# EAGLE board layout (EAGLE 9.1.3)
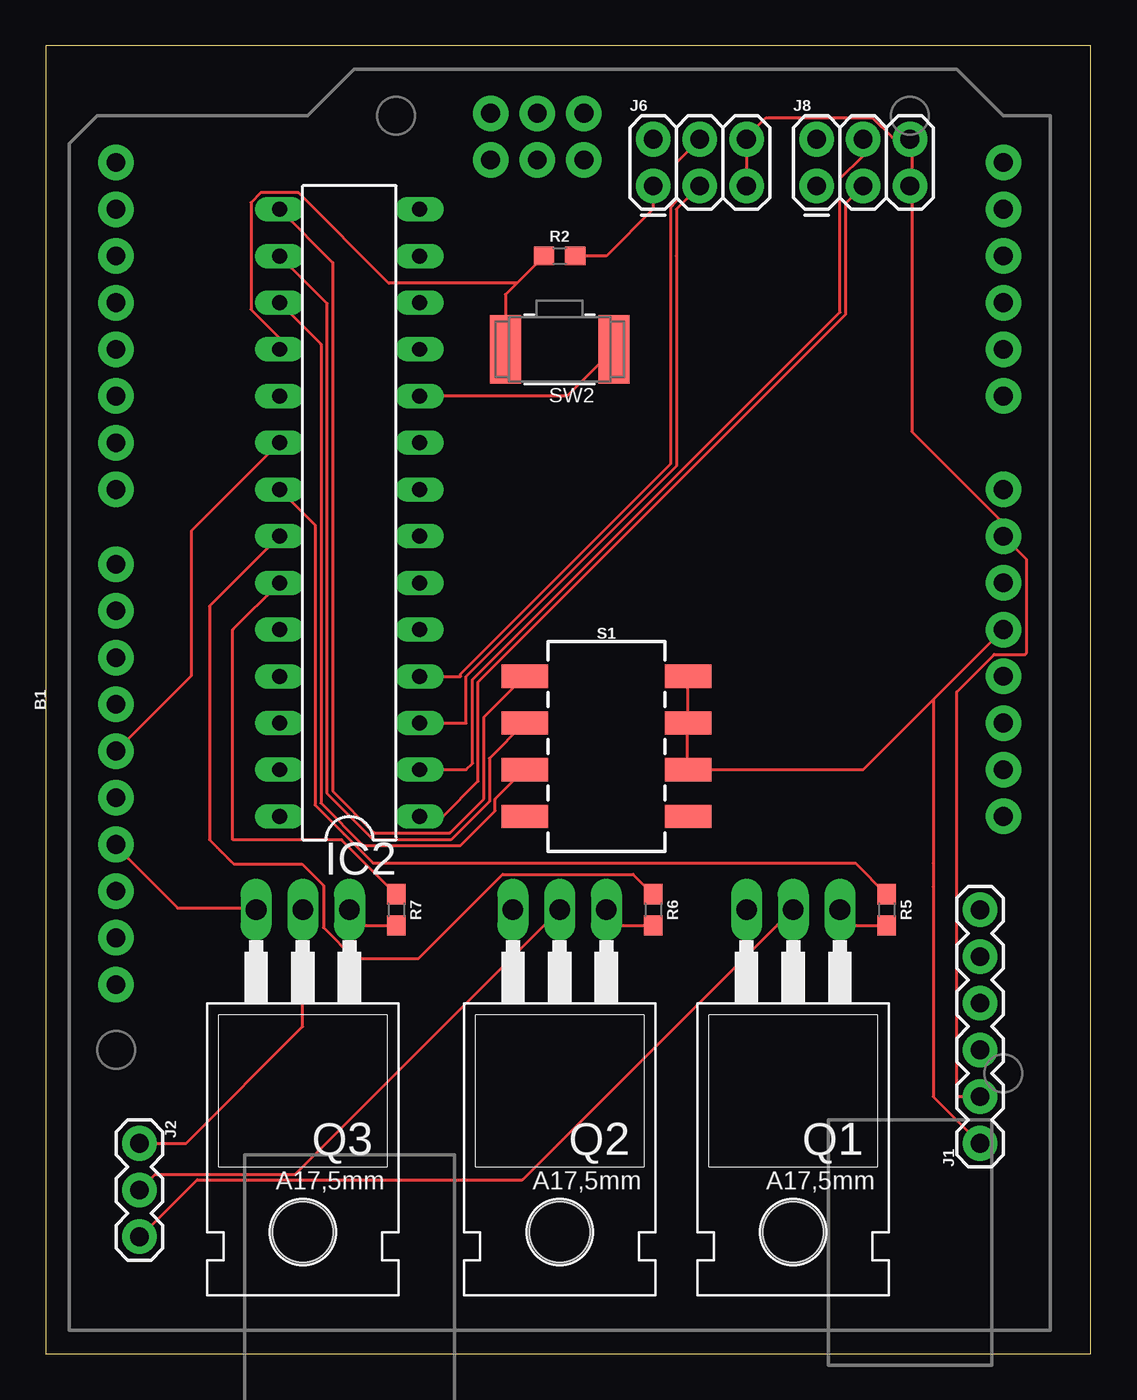
[diagram p0: board, top side]
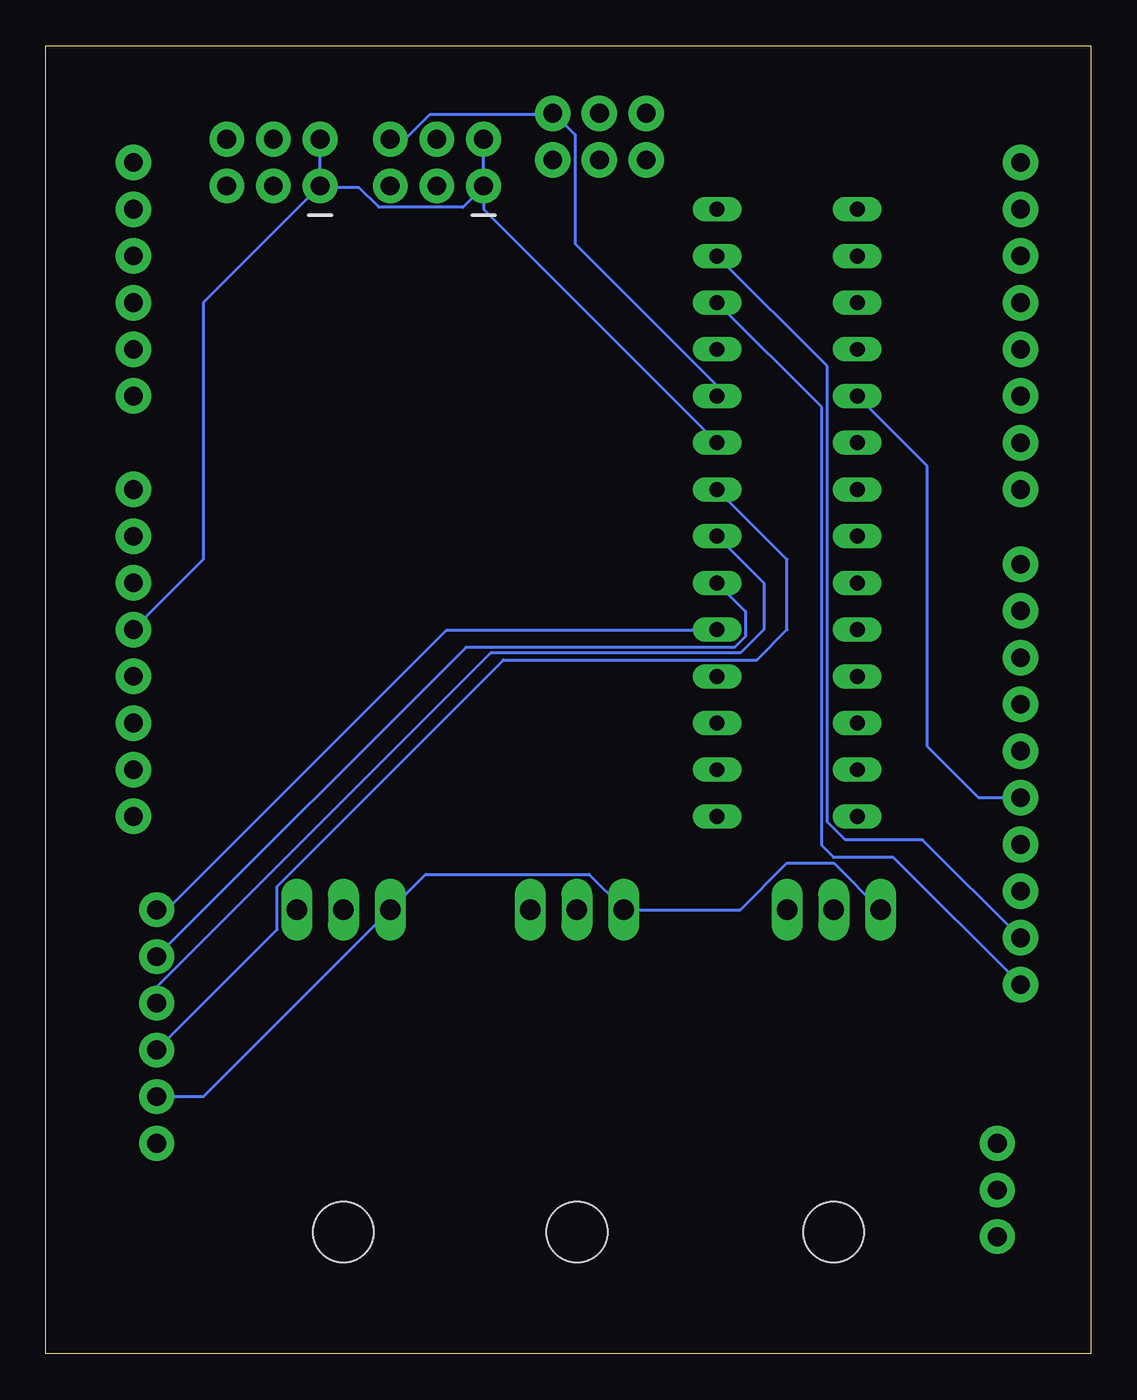
[diagram p1: board, bottom side, seen from below]

Size 56.82 x 71.11 mm. Coordinates in mm from the lower left corner, seen from the top.
Outline: 0,0 56.82,0 56.82,71.11 0,71.11 0,0
Copper layers (1*16): Top 0.035mm / dielectric 1.5mm / Bottom 0.035mm
Design rules "default": minimum track width 6mil, minimum drill 0.35mm, track to track 6mil, track to pad 6mil, pad to pad 6mil, via to via 6mil, smd to smd 6mil, copper to edge 40mil, drill to drill 6mil, minimum pad ring 10mil, minimum via ring 8mil, stop-mask expansion 4mil, vias tented up to drill 0mil, thermal gap 10mil

## Footprints (pad centres in the part's own frame; a part is rotated, then mirrored left to right if it is on the bottom)
ARDUINO_R3_NO_HOLES = drill 1.016 pad 1.93: 3.3V 1.27,-24.13; 5V 3.81,-24.13; A0 16.51,-24.13; A1 19.05,-24.13; A2 21.59,-24.13; A3 24.13,-24.13; A4 26.67,-24.13; A5 29.21,-24.13; AREF -10.414,24.13; D0 29.21,24.13; D1 26.67,24.13; D2 24.13,24.13; D3 21.59,24.13; D4 19.05,24.13; D5 16.51,24.13; D6 13.97,24.13; D7 11.43,24.13; D8 7.366,24.13; D9 4.826,24.13; D10 2.286,24.13; D11 -0.254,24.13; D12 -2.794,24.13; D13 -5.334,24.13; GND@1 6.35,-24.13; GND@2 8.89,-24.13; GND@3 -7.874,24.13; GND@4 31.89,-1.32; IOREF -3.81,-24.13; MISO 29.35,3.76; MOSI 31.89,1.22; NC -6.35,-24.13; RESET@1 -1.27,-24.13; RESET@2 29.35,-1.32; SCK 29.35,1.22; SCL -15.494,24.13; SDA -12.954,24.13; VCC 31.89,3.76; VIN 11.43,-24.13
DIL28-3 = drill 0.813 long: 1 -16.51,-3.81; 2 -13.97,-3.81; 3 -11.43,-3.81; 4 -8.89,-3.81; 5 -6.35,-3.81; 6 -3.81,-3.81; 7 -1.27,-3.81; 8 1.27,-3.81; 9 3.81,-3.81; 10 6.35,-3.81; 11 8.89,-3.81; 12 11.43,-3.81; 13 13.97,-3.81; 14 16.51,-3.81; 15 16.51,3.81; 16 13.97,3.81; 17 11.43,3.81; 18 8.89,3.81; 19 6.35,3.81; 20 3.81,3.81; 21 1.27,3.81; 22 -1.27,3.81; 23 -3.81,3.81; 24 -6.35,3.81; 25 -8.89,3.81; 26 -11.43,3.81; 27 -13.97,3.81; 28 -16.51,3.81
1X06 = drill 1.016 pad 1.88: 1 0,0; 2 2.54,0; 3 5.08,0; 4 7.62,0; 5 10.16,0; 6 12.7,0
1X03 = drill 1.016 pad 1.88: 1 0,0; 2 2.54,0; 3 5.08,0
2X3 = drill 1.016 pad 1.88: 1 0,0; 2 0,2.54; 3 2.54,0; 4 2.54,2.54; 5 5.08,0; 6 5.08,2.54
TO220 = drill 1.118 long: 1 -2.54,-6.35; 2 0,-6.35; 3 2.54,-6.35 | hole 3.302: 0,11.176
0603 = smd 1.1 x 1: 1 -0.85,0; 2 0.85,0
DIPSWITCH-04-SMD = smd 1.27 x 2.54: 1 -3.81,4.445; 2 -1.27,4.445; 3 1.27,4.445; 4 3.81,4.445; 5 3.81,-4.445; 6 1.27,-4.445; 7 -1.27,-4.445; 8 -3.81,-4.445
BTN_CK_KSS = smd 1.7 x 3.7: P$1 -2.95,0; P$2 2.95,0

## Placement (x,y rotation side)
B1  ARDUINO_UNO_R3NO_HOLES  [ARDUINO_R3_NO_HOLES]  27.94,35.56 90 top
IC2  MCP23017SP  [DIL28-3]  16.51,45.72 90 top
J1  IR Sensor  [1X06]  50.8,11.43 90 top
J2  LED  [1X03]  5.08,11.43 270 top
J6  Theta  [2X3]  33.02,63.5 0 top
J8  Radius  [2X3]  41.91,63.5 0 top
Q1  200mA/40V  [TO220]  40.64,17.78 180 top
Q2  200mA/40V  [TO220]  27.94,17.78 180 top
Q3  200mA/40V  [TO220]  13.97,17.78 180 top
R2  10k  [0603]  27.94,59.69 0 top
R5  100  [0603]  45.72,24.13 270 top
R6  100  [0603]  33.02,24.13 270 top
R7  100  [0603]  19.05,24.13 270 top
S1  DIP-04SMD  [DIPSWITCH-04-SMD]  30.48,33.02 270 top
SW2  Reset  [BTN_CK_KSS]  27.94,54.61 180 top

## Library data of the parts
B1 = SparkFun-Boards
IC2 SW2 = adafruit
J1 = SparkFun-Connectors; PROD_ID: CONN-08437
J2 = SparkFun-Connectors
J6 J8 = SparkFun-Connectors; PROD_ID: CONN-09701
Q1-Q3 = transistor-neu-to92
R2 = SparkFun-Resistors; PROD_ID: RES-00824
R5-R7 = SparkFun-Resistors; PROD_ID: RES-12438
S1 = SparkFun-Switches; PROD_ID: SWCH-12418

## Nets
A0: IC2.15 S1.8
A1: IC2.16 S1.7
A2: IC2.17 S1.6
B: IC2.23 R7.1
G: IC2.22 R6.1
GND: B1.GND@2 B1.GND@3 B1.GND@4 IC2.10 J1.2 J6.5 J6.6 J8.5 J8.6 Q1.3 Q2.3 Q3.3 SW2.P$1
INT_A: B1.D12 IC2.20
INT_B: B1.D13 IC2.19
IR_A: IC2.8 J1.3
IR_B: IC2.7 J1.4
IR_C: IC2.6 J1.5
IR_D: IC2.5 J1.6
N$14: Q1.1 R5.2
N$15: Q2.1 R6.2
N$16: Q3.1 R7.2
N$17: J2.3 Q1.2
N$18: J2.2 Q2.2
N$19: J2.1 Q3.2
R: IC2.21 R5.1
RADIUS_A: IC2.1 J8.3
RADIUS_B: IC2.2 J8.4
RESET: IC2.18 R2.1 SW2.P$2
SDA: B1.SDA IC2.13
SDL: B1.SCL IC2.12
THETA_A: IC2.3 J6.3
THETA_B: IC2.4 J6.4
VCC: B1.5V IC2.9 J1.1 J6.1 J6.2 J8.1 J8.2 R2.2 S1.1 S1.2 S1.3

## Tracks (layer width: path | path; a pad name or v marks a point on that pad's centre or on a via)
A0
  Top 0.152: S1.8 23.81,34.61 23.81,30.16 21.97,28.32 17.86,28.32 15.6,30.58 15.6,59.33 IC2.15
A1
  Top 0.152: IC2.16 15.29,57.1 15.29,30.45 17.8,27.94 22.02,27.94 24.12,30.04 24.12,32.37 S1.7
A2
  Top 0.152: IC2.17 14.96,54.89 14.96,29.93 17.26,27.64 22.55,27.64 24.43,29.52 24.43,30.15 S1.6
B
  Top 0.152: R7.1 16.09,27.94 10.16,27.94 10.16,39.37 IC2.23
G
  Top 0.152: R6.1 31.94,26.06 24.84,26.06 20.27,21.49 16.76,21.49 15.09,23.16 15.09,25.45 13.92,26.62 10.21,26.62 8.89,27.94 8.89,40.64 IC2.22
GND
  Top 0.152: J6.5 38.1,63.55 38.1,65.99 J6.6 38.1,66.14 39.17,67.21 44.96,67.21 46.02,66.14 46.94,66.14 J8.6 47.09,65.99 47.09,63.55 J8.5 47.09,63.4 47.09,50.14 51.97,45.26 51.97,44.5 B1.GND@2 53.34,43.18 53.34,38.1 53.26,38.02 51.58,38.02 49.53,35.98 49.53,13.97 J1.2 | B1.GND@3 3.81,27.58 7.16,24.23 11.43,24.23 Q3.3 11.43,24.08 | 25.3,24.08 Q2.3 | SW2.P$1 28.35,52.07 IC2.10
  Bottom 0.152: 28.04,60.35 20.42,52.73 20.42,52.12 IC2.10 | 28.04,60.35 28.04,66.29 29.11,67.36 B1.GND@4 29.26,67.36 35.97,67.36 37.19,66.14 38.1,66.14 J6.6 | Q1.3 38.1,24.08 | 28.04,60.35 | Q1.3 36.17,26.06 27.28,26.06 25.45,24.23 Q2.3 19.05,24.13 16.51,26.67 13.97,26.67 Q3.3 | Q1.3 48.26,13.97 J1.2
INT_A
  Top 0.152: IC2.20 7.9,44.73 7.9,36.85 B1.D12
INT_B
  Bottom 0.152: IC2.19 8.89,48.26 8.89,33.02 6.1,30.23 B1.D13
IR_A
  Bottom 0.152: 19.96,46.94 20.27,46.94 IC2.8 16.51,43.18 16.51,39.37 18.16,37.72 31.94,37.72 44.25,25.41 44.25,23.06 J1.3
IR_B
  Bottom 0.152: J1.4 50.8,19.94 32.64,38.1 19.05,38.1 17.78,39.37 17.78,41.91 IC2.7
IR_C
  Bottom 0.152: IC2.6 18.77,40.36 18.77,39 19.37,38.41 33.98,38.41 J1.5
IR_D
  Bottom 0.152: IC2.5 20.37,39.32 35.05,39.32 50.24,24.13 J1.6
N$14
  Top 0.152: Q1.1 44.03,23.28 R5.2
N$15
  Top 0.152: Q2.1 31.33,23.28 R6.2
N$16
  Top 0.152: Q3.1 17.36,23.28 R7.2
N$17
  Top 0.152: Q1.2 40.54,24.08 25.91,9.45 8.23,9.45 5.18,6.4 J2.3
N$18
  Top 0.152: Q2.2 27.89,24.08 13.56,9.75 5.94,9.75 5.18,8.99 J2.2
N$19
  Top 0.152: J2.1 7.62,11.43 13.97,17.78 Q3.2
  Bottom 0.152: 13.87,24.08 Q3.2 | 5.18,11.43 J2.1
R
  Top 0.152: IC2.21 14.63,45.06 14.63,29.82 16.2,28.25 16.22,28.25 17.79,26.67 44.03,26.67 R5.1
RADIUS_A
  Top 0.152: J8.3 43.48,62.53 43.48,56.51 23.51,36.53 23.51,31.13 21.59,29.21 IC2.1
  Bottom 0.152: 44.35,63.4 J8.3
RADIUS_B
  Top 0.152: J8.4 44.45,65.15 43.18,63.88 43.18,56.63 23.2,36.66 23.2,32.09 22.86,31.75 IC2.2
  Bottom 0.152: 44.5,65.99 J8.4
RESET
  Top 0.152: 12.65,54.71 IC2.18 12.7,55.23 11.15,56.78 11.15,62.6 11.67,63.12 13.73,63.12 18.64,58.21 25.61,58.21 | R2.1 25.61,58.21 | 25.61,58.21 24.99,57.59 SW2.P$2
SDA
  Bottom 0.152: B1.SDA 9.14,27.94 13.35,27.94 14.33,28.92 14.33,53.7 IC2.13
SDL
  Bottom 0.152: B1.SCL 10.72,26.98 13.97,26.98 14.63,27.64 14.63,51.46 IC2.12
THETA_A
  Top 0.152: J6.3 34.29,62.23 34.29,59.69 34.29,48.26 22.86,36.83 22.86,34.29 IC2.3
THETA_B
  Top 0.152: J6.4 34.29,64.77 34.29,62.66 33.98,62.36 33.98,48.39 22.55,36.96 22.55,36.83 IC2.4
VCC
  Top 0.152: 32.92,62.64 32.92,63.4 J6.1 33.02,62.23 30.48,59.69 R2.2 | 41.91,63.4 J8.1 | 34.9,34.29 34.9,36.73 S1.1 | 34.9,34.29 S1.2 34.9,34.29 | 34.9,34.29 34.9,31.85 S1.3 40.64,31.75 | J1.1 48.26,13.97 48.26,25.4 48.26,26.67 48.26,35.56 B1.5V 44.45,31.75 40.64,31.75 | 40.64,31.75 41.91,31.75
  Bottom 0.152: J8.1 41.91,63.4 39.78,63.4 38.71,62.33 34.14,62.33 33.07,63.4 J6.1 | J6.1 33.02,62.23 IC2.9 | J8.1 48.26,57.15 48.26,43.18 B1.5V | J8.1 J8.2 | J6.1 J6.2